# Altium PCB FM349readerV01.PcbDoc
Units mil, origin at the board's own origin, x right, y up, seen from the top; angles counter-clockwise.
Board outline 4950 x 3155 mil, 2 copper layers (Top Layer, Bottom Layer); 94 components, 76 nets, 417 pads, 114 vias.
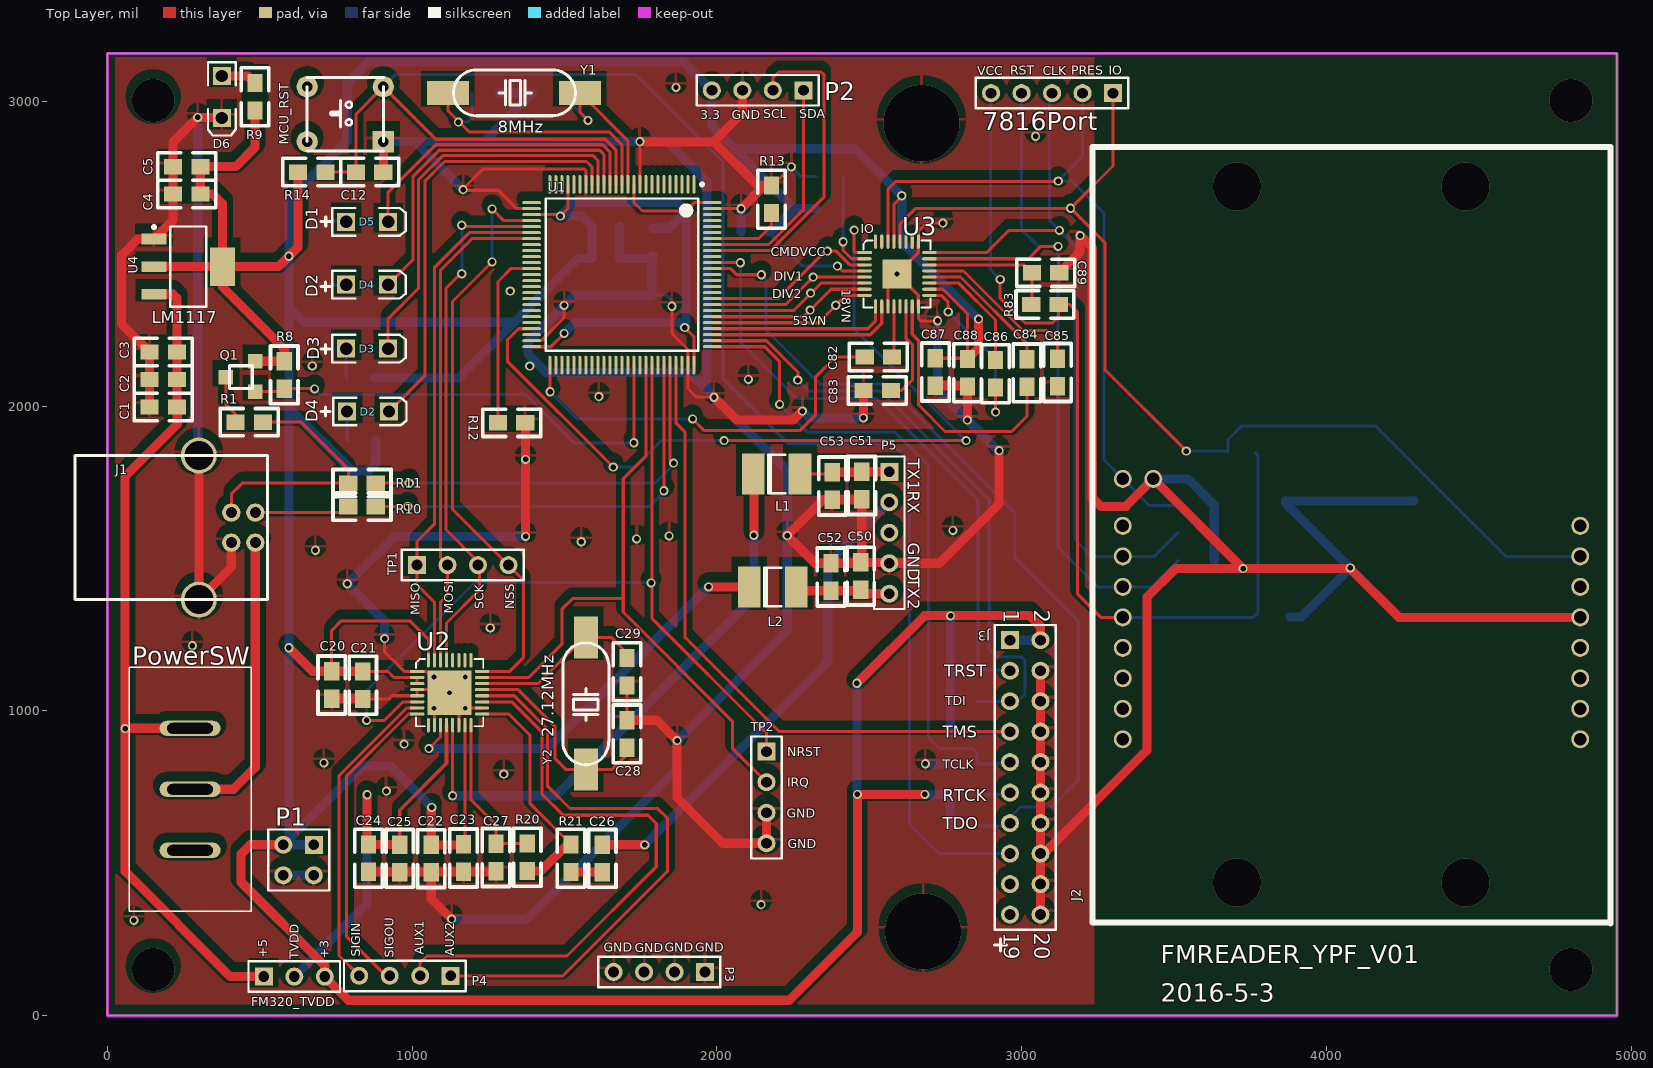
[diagram p0: Top Layer view]
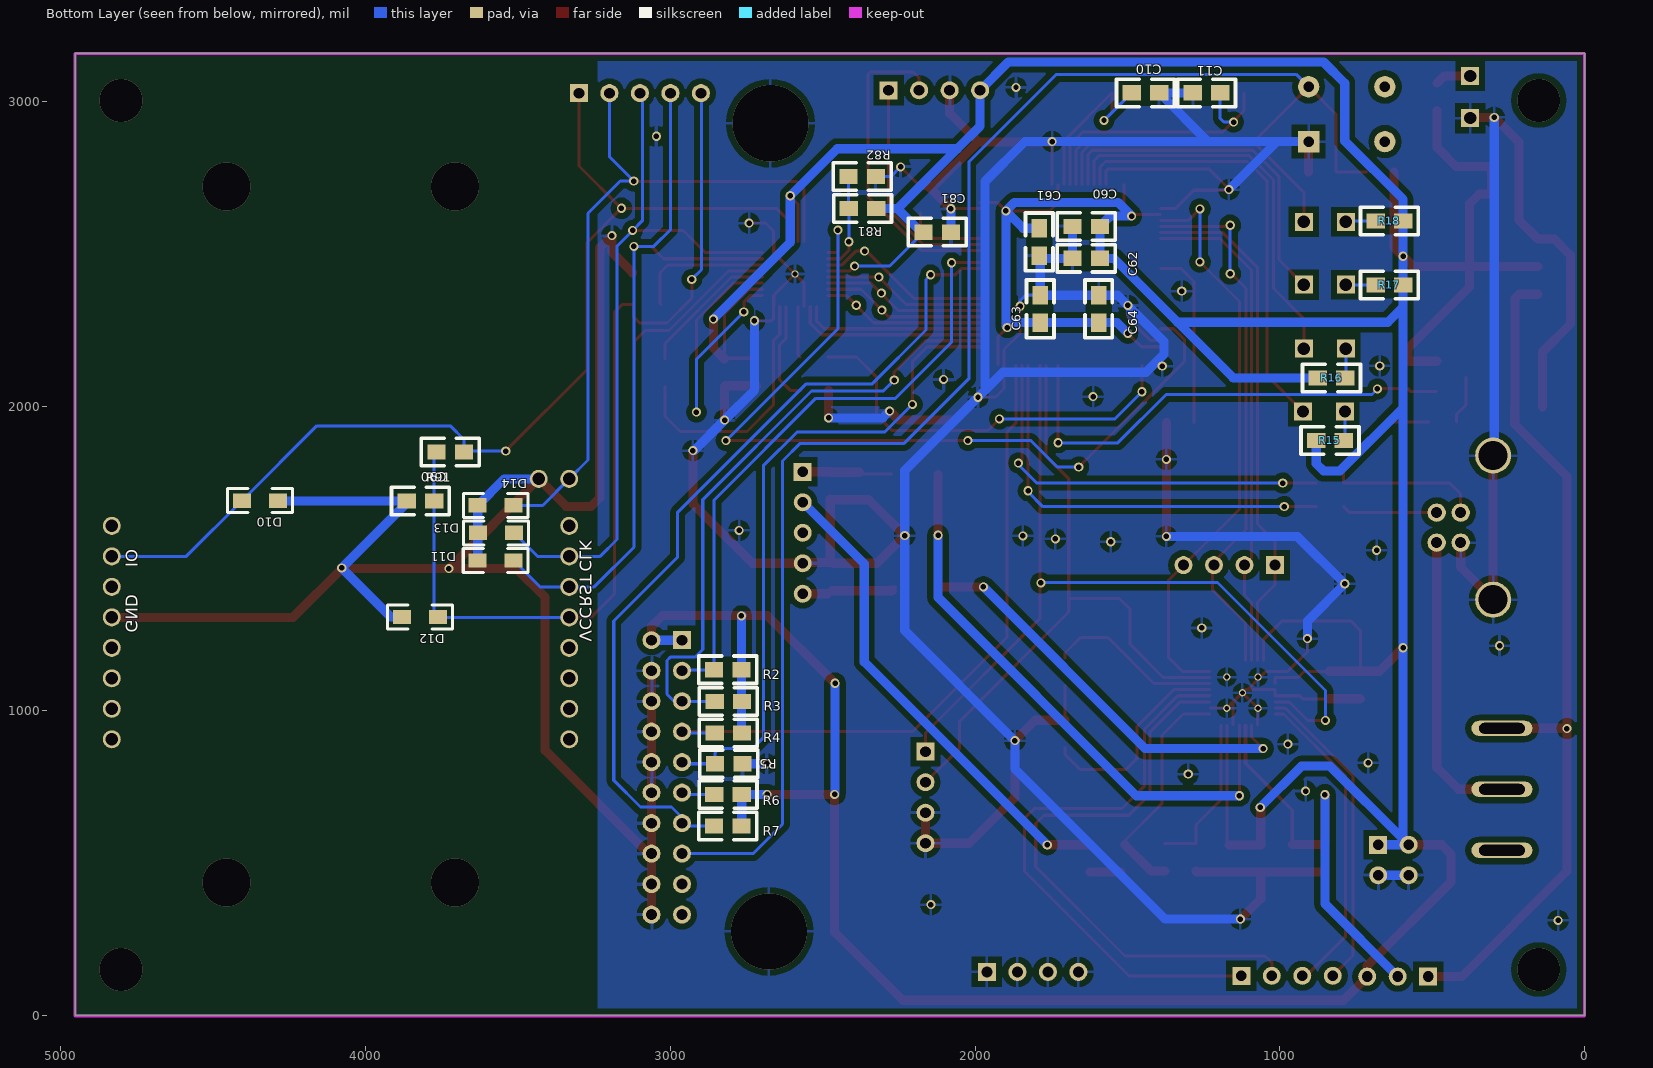
[diagram p1: Bottom Layer view, seen from below]

## Layer stack, top to bottom
Top Layer: signal copper 1.4
Dielectric: dielectric 12.6, FR-4, Dk 4.8
Bottom Layer: signal copper 1.4

## Board outline
0.98,3156.97 0.98,1.97 4950.98,1.97 4950.98,3156.97 0.98,3156.97

## Design rules (kind name [scope] priority, off if disabled: settings)
Clearance [(IsRegion)] p1: gap=19.68
Clearance Clearance_1 [All] p2: gap=8
ComponentClearance [All] p1 off: gap=10 collisioncheckmode=3 verticalgap=10 showdistances=FALSE
FabricationTestPointUsage TestPointUsage [All] p1: valid=0 allowmultiple=FALSE
FabricationTestpoint Testpoint [All] p1 off: side=3 testpointundercomponent=TRUE minsize=40 maxsize=100 preferedsize=60 minholesize=0 maxholesize=40 preferedholesize=32 testpointgrid=1 allowsidetop=TRUE allowsidebottom=TRUE usegrid=TRUE gridtolerance=0.01
HoleSize [All] p1 off: absolutevalues=TRUE maxlimit=196.85 minlimit=1 maxpercent=80.000 minpercent=20.000
MinimumSolderMaskSliver [All] p1: minsoldermaskwidth=3
PlaneConnect [All] p1: planeconnectstyle=Relief reliefexpansion=20 reliefentries=4 reliefconductorwidth=20 reliefairgap=10
PolygonConnect [All] p1: connectstyle=Relief reliefconductorwidth=10 reliefentries=4 polygonreliefangle="90 Angle"
RoutingVias [All] p1: holewidth=12 width=25 viastyle="Through Hole" minholewidth=10 minwidth=20 maxholewidth=19.68 maxwidth=31.5
SilkToSilkClearance [All] p1 off: silktosilkclearance=10
SilkscreenOverComponentPads [All] p1 off: minsilkscreentomaskgap=10
SolderMaskExpansion [All] p1: expansion=2
Width [All] p1: maxlimit=40 minlimit=10 preferedwidth=20
Width Width_1 [All] p2: maxlimit=10 minlimit=10 preferedwidth=10
20 further rules are at their usual default settings.

## Components (designator, comment, footprint, x,y, rotation, side; value= is the part's Value field where it differs from the comment)
7816Port "Header 5" HDR1X5 3299,3026 r180 top (schematic designator TP3)
C1 "10uF" 0805 138.98,1997.02 r0 top locked
C2 "10uF" 0805 228.98,2087.02 r180 top locked
C3 "0.1uF" 0805 138.98,2177.02 r0 top locked
C4 "10uF" 0805 305.98,2695.02 r180 top locked
C5 "0.1uF" 0805 215.98,2785.02 r0 top locked
C10 "20pF" 0805 1395.98,3026.97 r0 bottom
C11 "20pF" 0805 1285.98,3026.97 r180 bottom
C12 "1uF" 0805 905.98,2766.97 r180 top locked
C20 "10uF" 0805 736.5,1040 r90 top
C21 "0.1uF" 0805 838.7,1129.2 r270 top
C22 "10uF" 0805 1062.8,560.8 r270 top
C23 "0.1uF" 0805 1169.1,562.6 r270 top
C24 "0.1uF" 0805 857.6,562.2 r270 top
C25 "10uF" 0805 959.5,561.4 r270 top
C26 "0.1uF" 0805 1623.8,561.3 r270 top
C27 "0.1uF" 0805 1275.5,564.2 r270 top
C28 "15pF" 0805 1704.6,969.6 r270 top
C29 "15pF" 0805 1704.9,1083.7 r90 top
C50 "68pF" 0805 2471.3,1397.3 r90 top
C51 "68pF" 0805 2474.7,1694.2 r90 top
C52 "68pF" 0805 2373.7,1394.2 r90 top
C53 "68pF" 0805 2378.4,1692.8 r90 top
C60 "0.1uF" 0805 1680.5,2589.1 r180 bottom
C61 "0.1uF" 0805 1789.5,2493.1 r90 bottom
C62 "0.1uF" 0805 1680.5,2484.3 r180 bottom
C63 "0.1uF" 0805 1786.1,2363.4 r270 bottom
C64 "0.1uF" 0805 1594.5,2363.4 r270 bottom
C81 "0.1uF" 0805 2168.8,2570.2 r180 bottom
C82 "0.1uF" 0805 2484.3,2160.7 r0 top
C83 "0.1uF" 0805 2570.6,2051.2 r180 top
C84 "0.1uF" 0805 3016.4,2153.6 r270 top
C85 "0.1uF" 0805 3117,2065 r90 top
C86 "0.1uF" 0805 2913.7,2150.6 r270 top
C87 "0.1uF" 0805 2716.3,2066.6 r90 top
C88 "0.1uF" 0805 2821.6,2064.3 r90 top
C89 "0.1uF" 0805 3122.9,2436.8 r180 top
C90 "0.1uF" 0805 3774,1688.8 r0 bottom
D2 "LED2" 3.2X1.6X1.1 855.98,1981.97 r0 top locked
D3 "LED2" 3.2X1.6X1.1 852.98,2187.97 r0 top locked
D4 "LED2" 3.2X1.6X1.1 852.98,2397.97 r0 top locked
D5 "LED2" 3.2X1.6X1.1 852.98,2603.97 r0 top locked
D6 "LED2" 3.2X1.6X1.1 376,3013.1 r270 top
D10 "ESD" SOD-323 4344.56,1689.9 r0 bottom
D11 "ESD" SOD-323 3572.16,1493.2 r180 bottom
D12 "ESD" SOD-323 3820.14,1307.9 r180 bottom
D13 "ESD" SOD-323 3571.26,1584.2 r180 bottom
D14 "ESD" SOD-323 3571.96,1673.9 r180 bottom
FM320_TVDD "TVDD_SEL" HDR1X3 513.8,128.8 r0 top (schematic designator JP1)
J1 "USB" USB-B 485.98,1551.97 r0 top locked
J2 "Card Slot" BIG-CARD-SLOT 3330.98,906.97 r90 top
J3 "JTAG" HDR2X10 2960.98,1231.97 r270 top locked
L1 "1uH" 1812 2195.98,1776.97 r0 top locked
L2 "1uH" 1812 2182.98,1405.97 r0 top locked
MCU_RST "BUTTON" BUTTON-S 655.98,2866.97 r90 top locked (schematic designator RST)
P1 "Header 2X2" HDR2X2 677.9,561 r180 top
P2 "IIC_Port" HDR1X4 2283.46,3035.43 r180 top
P3 "CON4" HDR1X4 1961,144 r180 top
P4 "FM320_OUT" HDR1X4 1126.8,131.3 r180 top
P5 "Antenna" HDR1X5 2565.1,1784.3 r270 top locked
PowerSW "SW-SPST" SW 71.98,1143 r0 top (schematic designator S2)
Q1 "SI2301" SOT-23-2301 475.98,2056.97 r90 top locked
R1 "1.5K" 0805 510.98,1946.97 r180 top locked
R2 "10K" 0805 2765.98,1134.97 r0 bottom locked
R3 "10K" 0805 2763.98,1030.97 r0 bottom locked (schematic designator R2)
R4 "10K" 0805 2763.98,927.97 r0 bottom locked (schematic designator R3)
R5 "10K" 0805 2852.6,826.8 r180 bottom locked (schematic designator R3)
R6 "10K" 0805 2764.98,725.97 r0 bottom locked (schematic designator R4)
R7 "10K" 0805 2765.98,622.97 r0 bottom locked (schematic designator R5)
R8 "10K" 0805 580.98,2146.97 r270 top locked
R9 "1.5K" 0805 485,3059 r270 top
R10 "33" 0805 790.98,1669.97 r0 top locked
R11 "33" 0805 790.98,1746.97 r0 top locked
R12 "100K" 0805 1371.7,1944.9 r180 top
R13 "100K" 0805 2178.5,2723.1 r270 top
R14 "10K" 0805 625.98,2766.97 r0 top locked
R15 "330" 0805 790.98,1886.97 r0 bottom locked
R16 "330" 0805 875.98,2091.97 r180 bottom locked
R17 "330" 0805 685.98,2396.97 r180 bottom
R18 "330" 0805 685.98,2606.97 r180 bottom
R20 "820" 0805 1377.8,475.2 r90 top
R21 "1K" 0805 1521.3,471.7 r90 top
R81 "1.5K" 0805 2413.8,2647.5 r180 bottom
R82 "1.5K" 0805 2325,2752.3 r0 bottom
R83 "10K" 0805 3030.6,2332.9 r0 top
R91 "1.5K" 0805 3676,1849 r0 bottom
TP1 "CON4" HDR1X4 1016.4,1478.2 r0 top
TP2 "CON4" HDR1X4 2162.5,866.2 r270 top
U1 "STM32F103VBT6" LQFP100_L 1688.2,2430.6 r270 top locked
U2 "FM320" FM320_PIN32 1123.08,1059.83 r270 top
U3 "TDA8035" TDA8035_PIN32 2590.18,2432.93 r270 top locked
U4 "LM1117MP-3.3" MP04A_L 265.98,2456.97 r0 top locked
Y1 "8M" XTAL-0.2 1235.98,3026.97 r0 top
Y2 "27.12M" XTAL-0.2 1569.9,1123.29 r270 top

## Footprints (in the part's own frame and the unit in brackets; to place one, negate y for a bottom-side part, rotate by r counter-clockwise, add the part's x,y. Pads: shape width x height; smd on the part's side, far side on the other; paste and mask are expansions set on the pad)
3.2X1.6X1.1 [mm] "SMT LED; 2 Flat Leads"
  rect 1.5x1.5 hole 1.016: 1(-1.75,0) 2(1.75,0)
  silkscreen extent -2.9,-1.15 3.2,1.15
0805 [mil]
  rect 60x50 smd: 1(0,0) 2(90,0)
  silkscreen extent -50,-45 140,45
1812 [mm] "Chip Capacitor; Body 4.5 x 3.2 mm (LxW typ)"
  rect 1.9x3.4 smd: 1(-1.95,0) 2(1.95,0)
  silkscreen extent -0.7,-1.6 0.7,1.6
BIG-CARD-SLOT [mm]
  round 1.5 hole 1.05: 0(0,0) 0(0,-38.1) 0(2.54,0) 0(2.54,-38.1) 0(5.08,0) 0(5.08,-38.1) 0(7.62,0) 0(7.62,-38.1) 1(10.16,0) 2(12.7,0) 3(15.24,0) 4(17.78,0) 5(10.16,-38.1) 6(12.7,-38.1) 7(15.24,-38.1) 8(17.78,-38.1) 9(21.692,0) 10(21.692,-2.54)
  silkscreen extent -15.34,-40.64 49.33,2.54
BUTTON-S [mil]
  rect 70x70 hole 35: 1(0,-250)
  round 70 hole 35: 2(180,-250) 3(0,0) 4(180,0)
  silkscreen extent -30,-250 210,0
FM320_PIN32 [mm]
  rect 0.254x1.2 smd: 1(-1.777,-2.694)
  oval 0.254x1.2 smd: 2(-1.269,-2.694) 3(-0.761,-2.694) 4(-0.253,-2.694) 5(0.255,-2.694) 6(0.763,-2.694) 7(1.271,-2.694) 8(1.779,-2.694) 17(1.779,2.706) 18(1.271,2.706) 19(0.763,2.706) 20(0.255,2.706) 21(-0.253,2.706) 22(-0.761,2.706) 23(-1.269,2.706) 24(-1.777,2.706)
  oval 1.2x0.254 smd: 9(2.701,-1.772) 10(2.701,-1.264) 11(2.701,-0.756) 12(2.701,-0.248) 13(2.701,0.26) 14(2.701,0.768) 15(2.701,1.276) 16(2.701,1.784) 25(-2.699,1.784) 26(-2.699,1.276) 27(-2.699,0.768) 28(-2.699,0.26) 29(-2.699,-0.248) 30(-2.699,-0.756) 31(-2.699,-1.264) 32(-2.699,-1.772)
  round 0.6 hole 0.4: 33(-1.299,1.306) 33(-1.299,-1.294) 33(0.001,0.006) 33(1.301,1.306) 33(1.301,-1.294)
  rect 3.683x3.683 smd: 33(0.001,0.006)
  silkscreen extent -2.8,-2.79 2.8,2.81
HDR1X3 [mm] "Connector; Header; 3 Position"
  rect 1.5x1.5 hole 0.9: 1(0,0)
  round 1.5 hole 0.9: 2(2.54,0) 3(5.08,0)
  silkscreen extent -1.27,-1.27 6.35,1.27
HDR1X4 [mm] "Connector; Header; 4 Position"
  rect 1.5x1.5 hole 0.9: 1(0,0)
  round 1.5 hole 0.9: 2(2.54,0) 3(5.08,0) 4(7.62,0)
  silkscreen extent -1.27,-1.27 8.89,1.27
HDR1X5 [mm] "Connector; Header; 5 Position"
  rect 1.5x1.5 hole 0.9: 1(0,0)
  round 1.5 hole 0.9: 2(2.54,0) 3(5.08,0) 4(7.62,0) 5(10.16,0)
  silkscreen extent -1.27,-1.27 11.43,1.27
HDR2X2 [mm] "Connector; Header; 2x2 Position"
  rect 1.5x1.5 hole 0.9: 1(0,0)
  round 1.5 hole 0.9: 2(0,2.54) 3(2.54,0) 4(2.54,2.54)
  silkscreen extent -1.27,-1.27 3.81,3.81
HDR2X10 [mm] "Connector; Header; 10x2 Position"
  rect 1.5x1.5 hole 0.9: 1(0,0)
  round 1.5 hole 0.9: 2(0,2.54) 3(2.54,0) 4(2.54,2.54) 5(5.08,0) 6(5.08,2.54) 7(7.62,0) 8(7.62,2.54) 9(10.16,0) 10(10.16,2.54) 11(12.7,0) 12(12.7,2.54) 13(15.24,0) 14(15.24,2.54) 15(17.78,0) 16(17.78,2.54) 17(20.32,0) 18(20.32,2.54) 19(22.86,0) 20(22.86,2.54)
  silkscreen extent -1.27,-1.27 24.13,3.81
LQFP100_L [mm] "Thin QFP, 100-Leads, Body 14x14mm, Pitch 0.5mm, IPC High Density"
  oval 1.55x0.25 smd: 1(-7.525,6) 2(-7.525,5.5) 3(-7.525,5) 4(-7.525,4.5) 5(-7.525,4) 6(-7.525,3.5) 7(-7.525,3) 8(-7.525,2.5) 9(-7.525,2) 10(-7.525,1.5) 11(-7.525,1) 12(-7.525,0.5) 13(-7.525,0) 14(-7.525,-0.5) 15(-7.525,-1) 16(-7.525,-1.5) 17(-7.525,-2) 18(-7.525,-2.5) 19(-7.525,-3) 20(-7.525,-3.5) 21(-7.525,-4) 22(-7.525,-4.5) 23(-7.525,-5) 24(-7.525,-5.5) 25(-7.525,-6) 51(7.525,-6) 52(7.525,-5.5) 53(7.525,-5) 54(7.525,-4.5) 55(7.525,-4) 56(7.525,-3.5) 57(7.525,-3) 58(7.525,-2.5) 59(7.525,-2) 60(7.525,-1.5) 61(7.525,-1) 62(7.525,-0.5) 63(7.525,0) 64(7.525,0.5) 65(7.525,1) 66(7.525,1.5) 67(7.525,2) 68(7.525,2.5) 69(7.525,3) 70(7.525,3.5) 71(7.525,4) 72(7.525,4.5) 73(7.525,5) 74(7.525,5.5) 75(7.525,6)
  oval 0.25x1.55 smd: 26(-6,-7.525) 27(-5.5,-7.525) 28(-5,-7.525) 29(-4.5,-7.525) 30(-4,-7.525) 31(-3.5,-7.525) 32(-3,-7.525) 33(-2.5,-7.525) 34(-2,-7.525) 35(-1.5,-7.525) 36(-1,-7.525) 37(-0.5,-7.525) 38(0,-7.525) 39(0.5,-7.525) 40(1,-7.525) 41(1.5,-7.525) 42(2,-7.525) 43(2.5,-7.525) 44(3,-7.525) 45(3.5,-7.525) 46(4,-7.525) 47(4.5,-7.525) 48(5,-7.525) 49(5.5,-7.525) 50(6,-7.525) 76(6,7.525) 77(5.5,7.525) 78(5,7.525) 79(4.5,7.525) 80(4,7.525) 81(3.5,7.525) 82(3,7.525) 83(2.5,7.525) 84(2,7.525) 85(1.5,7.525) 86(1,7.525) 87(0.5,7.525) 88(0,7.525) 89(-0.5,7.525) 90(-1,7.525) 91(-1.5,7.525) 92(-2,7.525) 93(-2.5,7.525) 94(-3,7.525) 95(-3.5,7.525) 96(-4,7.525) 97(-4.5,7.525) 98(-5,7.525) 99(-5.5,7.525) 100(-6,7.525)
  silkscreen extent -7.65,-6.35 6.35,6.8, body extent -7,-7 7,7, height 1.6
MP04A_L [mm] "SOT223, 4-Leads, Body 6.5x3.5mm, Pitch 2.3mm, Lead Span 7mm, IPC High Density"
  rect 2.1x0.9 smd: 1(-2.85,2.3) 2(-2.85,0) 3(-2.85,-2.3)
  rect 2.1x3.2 smd: 4(2.85,0)
  silkscreen extent -2.97,-3.35 1.5,3.42, body extent -1.85,-3.35 1.85,3.35, height 1.8
SOD-323 [mm]
  rect 1.5x1.2 smd: 1(-1.5,0) 2(1.5,0)
  silkscreen extent -2.7,-1 2.7,1
SOT-23-2301 [mm]
  rect 1.2x1.2 smd: 1(-0.254,-0.254) 2(2.286,-0.254) 3(0.95,2.2)
  silkscreen extent 0,0 1.91,1.91
SW [mil]
  oval 200x50 hole 35 slot 150 at 0 deg: 1(200,-400) 2(200,-200) 3(200,-600)
  silkscreen extent 0,-800 400,0
TDA8035_PIN32 [mm]
  rect 0.254x1.2 smd: 1(-1.777,-2.694)
  oval 0.254x1.2 smd: 2(-1.269,-2.694) 3(-0.761,-2.694) 4(-0.253,-2.694) 5(0.255,-2.694) 6(0.763,-2.694) 7(1.271,-2.694) 8(1.779,-2.694) 17(1.779,2.706) 18(1.271,2.706) 19(0.763,2.706) 20(0.255,2.706) 21(-0.253,2.706) 22(-0.761,2.706) 23(-1.269,2.706) 24(-1.777,2.706)
  oval 1.2x0.254 smd: 9(2.701,-1.772) 10(2.701,-1.264) 11(2.701,-0.756) 12(2.701,-0.248) 13(2.701,0.26) 14(2.701,0.768) 15(2.701,1.276) 16(2.701,1.784) 25(-2.699,1.784) 26(-2.699,1.276) 27(-2.699,0.768) 28(-2.699,0.26) 29(-2.699,-0.248) 30(-2.699,-0.756) 31(-2.699,-1.264) 32(-2.699,-1.772)
  rect 2.4x2.4 smd: 33(0.001,0.006)
  round 0.6 hole 0.4: 33(0.001,0.006)
  silkscreen extent -2.8,-2.79 2.8,2.81
USB-B [mm]
  round 1.524 hole 0.92: 1(0,0) 2(0,2.5) 3(-2,2.5) 4(-2,0)
  round 3 hole 2.4: 5(-4.7,7.25) 6(-4.7,-4.75)
  silkscreen extent -15,-4.75 1,7.25
XTAL-0.2 [mm]
  rect 3.5x2 smd: 1(-3,0) 2(8,0)
  silkscreen extent -2.54,-1.91 7.62,1.91

## Part data
7816Port: "Header, 5-Pin"
C1 C3 C5 C10 C11 C12 C20 C21 C22 C23 C24 C26 C27 C28 C29 C50 C51 C52 C53 C60 C61 C62 C63 C64 C81 C82 C83 C84 C85 C86 C87 C88 C89 C90: library part Cap, "Capacitor"
C2 C4: library part "Cap Pol1", "Polarized Capacitor (Radial)"
C25: library part CAP, "Capacitor"
D2 D3 D4 D5 D6: "Typical RED, GREEN, YELLOW, AMBER GaAs LED"
D10 D11 D12 D13 D14: library part "D Zener", "Zener Diode"
FM320_TVDD: library part "Header 3", "Header, 3-Pin"
J3: library part "Header 10X2", "Header, 10-Pin, Dual row"
L1 L2: library part Inductor, "Inductor"
MCU_RST: "ƹ?"
P1: "Header, 2-Pin, Dual row"
P2 P4: library part "Header 4", "Header, 4-Pin"
P3 TP1 TP2: "Connector"
P5: library part "Header 5", "Header, 5-Pin"
PowerSW: "Single-Pole, Single-Throw Switch"
Q1: library part PMOS-2, "P-Channel Power MOSFET"
R1 R2 R3 R4 R5 R6 R7 R8 R9 R10 R11 R12 R13 R14 R15 R16 R17 R18 R20 R21 R81 R82 R83 R91: library part Res2, "Resistor"
U1: "STM32 ARM-based 32-bit MCU with 64 Kbytes Flash, 100-pin LQFP, Industrial Temperature"
U2: library part PN5120A0HN1
U4: "800mA Low-Dropout Linear Regulator"
Y1 Y2: library part XTAL, "Crystal Oscillator"

## Via types
v1: diameter 30, hole 18, Top Layer to Bottom Layer, 104 vias
v2: diameter 140, hole 140, Top Layer to Bottom Layer, 4 vias
v3: diameter 157.48, hole 157.48, Top Layer to Bottom Layer, 4 vias
v4: diameter 250, hole 250, Top Layer to Bottom Layer, 2 vias

## Nets (pads, with @x,y where several pads share a name; then routed paths per layer and width w, separated by ;. In a path a pad name is that pad's centre, name@x,y a point inside that pad or via, vN(x,y) a via of type N, cw(c..) or ccw(c..) an arc to the next point about the centre after c; other vN are vias at no path point)
+3.3: C4.1 C5.2 C20.2 C21.1 C22.1 C23.1 C60.2 C61.2 C62.2 C63.2 C64.2 C81.1 C87.2 C88.2 FM320_TVDD.3 J3.1 J3.2 P1.1 P1.3 P2.4 Q1.2 R2.1 R3.1 R4.1 R6.1 R7.1 R8.1 R9.2 R14.1 R15.2 R16.1 R17.2 R18.2 R81.2 U1.11 U1.22 U1.28 U1.50 U1.75 U1.100 U2.2 U2.3 U2.15 U2.32 U3.4 U3.18 U3.29 U4.2 U4.4 | length 20581.8
  Top Layer w10: C20.2 736.5,1263.6 768.2,1295.3 992.6,1295.3 1053.3,1234.6 U2.32 ; C21.1 921.1,1129.2 940.5,1109.8 U2.2 U2.3 ; C23.1@1167.3,560.8 C23.1 1173.3,566.8 U2.15 ; U1.50 1455.18,2194.38 v1(1498.8,2238) ; U1.28 1482.25,2627.45 v1(1486.6,2623.1) 1511.03,2647.53 U1.22 ; U1.11 1727.57,2667.73 1755.7,2639.6 v1(1898.7,2639.6) 1925.92,2666.82 U1.100 ; v1(1894.4,2257.1) 1924.42,2227.08 U1.75 ; v1(2395,2459) 2411.1,2442.9 U3.4 ; U3.29 2580.4,2661.8 v1@2607.4,2688.8 ; U3.18 2741.26,2382.9 2821.6,2302.56 C88.2 2819.3,2156.6 C87.2
  Top Layer w30: U4.2 U4.4 ; R9.2 485,2848 422.02,2785.02 C5.2 C4.1 347.08,2695.02 378.19,2663.91 U4.4 ; Q1.2 R8.1 580.98,2188.02 378.19,2390.81 U4.4 ; P1.3 469.4,561 439,530.6 439,439 713.8,164.2 FM320_TVDD.3 ; v1(596.5,1207.2) 673.7,1130 C20.2 837.9,1130 C21.1 ; R14.1 625.98,2520.88 v1(596.4,2491.3) 562.07,2456.97 U4.4 ; FM320_TVDD.3@718.7,133.7 FM320_TVDD.3 ; v1(1064.5,683.8) 1062.8,682.1 C22.1 C23.1@1167.3,560.8 ; v1(2459.25,1090.65) 2681,1312.4 3025.4,1312.4 3060.98,1276.82 J3.2 ; v1(2681.8,726.2) v1(2460.4,726.2) 2460.4,274.4 2237,51 791.6,51 FM320_TVDD.3 ; C88.2 2858,2190.7 v1(2858,2285)
  Bottom Layer w10: C81.1 2280,2459 v1(2395,2459)
  Bottom Layer w30: P1.1 P1.3 P1.3@595.98,579.08 ; R16.1 876.42,2092.4 1153.4,2092.4 1335.6,2274.6 ; R15.2 880.98,1810.98 856.8,1786.8 803.63,1786.8 595.98,1994.44 ; v1(1064.5,683.8) 929.4,818.9 835.8,818.9 P1.3@595.98,579.08 ; v1(1498.8,2238) 1534.2,2273.4 C64.2 C63.2 1878.1,2273.4 v1(1894.4,2257.1) 1898.7,2261.4 v1(1898.7,2639.6) ; C61.2 1842.2,2583.1 v1(1898.7,2639.6) ; C81.1 2176.9,2570.2 2254.2,2647.5 ; R81.2 2254.2,2647.5 ; v1(2459.25,1090.65) 2459.25,727.35 v1(2460.4,726.2) ; v1(2681.8,726.2) 2682.03,725.97 R6.1 2764.98,623.97 R7.1 ; R4.1 2765.98,929.97 R2.1 v1(2765.98,1311.72) v1@2765.3,1312.4 ; v1(2858,2285) 2606.1,2536.9 v1(2606.1,2689.5) 2452,2843.6 2058.1,2843.6 ; J3.1 J3.2 ; P1.3@595.98,579.08 595.98,1994.44 ; 595.98,1994.44 595.98,2325.02 ; 595.98,2325.02 R17.2 R18.2 595.98,2677.58 787.5,2869.1 787.5,3058.6 857.24,3128.34 1890.56,3128.34 P2.4 1983.46,2918.24 2058.1,2843.6 ; 595.98,2325.02 646.4,2274.6 1335.6,2274.6 ; 1335.6,2274.6 1545.3,2484.3 C62.2 C60.2 1556.5,2623.1 v1(1486.6,2623.1) 1531.3,2667.8 1870.5,2667.8 v1(1898.7,2639.6) ; 2058.1,2843.6 2254.2,2647.5
+5: C1.2 C2.1 C3.2 FM320_TVDD.1 PowerSW.2 U4.3 | length 2842.4
  Top Layer w30: U4.3 215.88,2366.42 228.98,2353.32 C3.2 C2.1 C1.2 230.1,1995.91 230.1,1940.3 59.1,1769.3 v1(59.1,942) ; PowerSW.2 60.1,943 v1(59.1,942) ; FM320_TVDD.1 404,128.8 59.1,473.7 v1(59.1,942)
CARDCLK: 7816Port.3 D13.2 J2.3 U3.24 | length 2350.7
  Top Layer w10: U3.24 2884.3,2502.9 2957.1,2575.7 v1(3123,2575.7)
  Bottom Layer w10: 7816Port.3 3091.3,3018.3 3091.3,2607.4 v1(3123,2575.7) 3174.4,2524.3 3174.4,1561.9 3229.33,1506.97 J2.3 3434.97,1506.97 D13.2
CARDIO: 7816Port.1 D10.2 J2.7 R91.1 U3.28 | length 3559.5
  Top Layer w10: U3.28 2600.4,2596.8 2652,2648.4 v1(3160,2648.4) ; 7816Port.1 3299,2787.4 v1(3160,2648.4) ; v1@3537,1849 3537,1855 3272,2120 3272,2536.4 v1(3160,2648.4)
  Bottom Layer w10: v1(3539,1852) 3673,1852 R91.1 3676,1890 3721,1935 4158.51,1935 D10.2 4586.54,1506.97 J2.7
CARDPRES: 7816Port.2 D14.2 J2.9 U3.30 | length 2370.7
  Top Layer w10: U3.30 2560.4,2710.2 2586.3,2736.1 3117.6,2736.1 v1(3119.3,2737.8)
  Bottom Layer w10: 7816Port.2 3199,2817.5 v1(3119.3,2737.8) 3163.2,2737.8 3269,2632 3269,1822.97 J2.9 3418.07,1673.9 D14.2
CARDRST: 7816Port.4 D11.2 J2.2 U3.23 | length 2499.5
  Top Layer w10: U3.23 3021.4,2482.9 3062,2523.5 v1(3118.7,2523.5)
  Bottom Layer w10: 7816Port.4 2999,2578 3053.5,2523.5 v1(3118.7,2523.5) 3118.7,1537.2 3248.93,1406.97 J2.2 3426.87,1406.97 D11.2
CARDVCC: 7816Port.5 C90.1 D12.2 J2.1 R83.2 R91.2 | length 3112.9
  Top Layer w10: v1(2928.9,2415.3) 2928.9,2353.7 3010.5,2272.1 3099.8,2272.1 3120.6,2292.9 R83.2 3157.1,2332.9 3183,2307 3183,1383 3259.03,1306.97 J2.1
  Bottom Layer w10: 7816Port.5 2897,3024 2897,2447.2 v1(2928.9,2415.3) ; J2.1 3760.16,1306.97 D12.2 3774,1320.81 C90.1 3774,1838 R91.2@3767,1845
FM320_AUX1: P4.2 U2.19 | length 1945
  Top Layer w10: P4.2 1026.8,173.8 1049.1,196.1 1508,196.1 1800.9,489 1800.9,631.1 1774.1,657.9 1495.7,657.9 1425.8,727.8 1425.8,931.4 1327.4,1029.8 U2.19
FM320_AUX2: P4.1 U2.20 | length 1911.4
  Top Layer w10: P4.1 1495,131.3 1837.8,474.1 1837.8,647.8 1804.6,681 1803.7,680.1 1518.2,680.1 1443.8,754.5 1443.8,941 1335,1049.8 U2.20
FM320_IRQ: TP2.2 U1.67 U2.23 | length 2231
  Top Layer w10: U2.23 1382.9,1109.8 1491.4,1218.3 1491.4,1333.4 1526,1368 1692.65,1368 ; U1.67 1766.94,1835.24 1692.65,1760.95 1692.65,1324.35 2050.6,966.4 2050.6,878.1 TP2.2
FM320_NRST: TP2.1 U1.68 U2.6 | length 2793.3
  Top Layer w10: v1(851,969) 909.7,969 970.5,1029.8 U2.6 ; U1.68 1786.3,2134.01 1786.3,1303.7 2162.5,927.5 TP2.1
  Bottom Layer w10: v1(851,969) 851,1067 1205,1421 1783,1421 v1(1784,1420)
FM320_SIGIN: P4.4 U2.7 | length 1032.3
  Top Layer w10: P4.4 760.3,197.8 760.3,787.1 983,1009.8 U2.7
FM320_SIGOUT: P4.3 U2.8 | length 1037.7
  Top Layer w10: P4.3 914.1,131.3 784.73,260.67 784.73,786.07 988.46,989.8 U2.8
FM320_SPI_MISO: TP1.1 U1.31 U2.31 | length 1700.8
  Top Layer w10: U2.31 1073.3,1357.29 1016.4,1414.19 TP1.1 1016.4,1555.7 1073.3,1612.6 1073.3,2453.6 1188.1,2568.4 U1.31
FM320_SPI_MOSI: TP1.2 U1.32 U2.30 | length 1639.9
  Top Layer w10: U2.30 1093.3,1357.3 1116.4,1380.4 TP1.2 1093.3,1501.3 1093.3,2445.5 1196.51,2548.71 U1.32
FM320_SPI_NSS: TP1.4 U1.29 U2.24 | length 1921.6
  Top Layer w10: U2.24 1320.4,1129.8 1365.1,1174.5 1365.1,1429.5 TP1.4 1132.8,1661.8 1132.8,2343 v1(1262.3,2472.5) ; v1(1262.3,2646.5) 1301.03,2607.77 U1.29
  Bottom Layer w10: v1(1262.3,2472.5) v1(1262.3,2646.5)
FM320_SPI_SCK: TP1.3 U1.30 U2.29 | length 1772
  Top Layer w10: U2.29 1113.3,1288.3 1221.95,1396.95 1221.95,1472.65 TP1.3 1216.4,1489.6 1111.3,1594.7 1111.3,2385.9 1159,2433.6 v1(1163.2,2433.6) ; v1(1163.2,2592.7) 1167.82,2588.08 U1.30
  Bottom Layer w10: v1(1163.2,2433.6) v1(1163.2,2592.7)
FM320_TVDD: C24.1 C25.1 FM320_TVDD.2 U2.12 | length 1418.4
  Top Layer w10: C24.1@852.5,567.3 C24.1 ; C25.1@958.7,562.2 C25.1
  Top Layer w12: C25.1 959.5,674.4 1113.3,828.2 U2.12
  Top Layer w30: C24.1@852.5,567.3 v1(852.5,725.2) ; C24.1 C25.1@958.7,562.2
  Bottom Layer w30: FM320_TVDD.2 852.5,367.5 v1(852.5,725.2)
GND: C1.1 C2.2 C3.1 C4.2 C5.1 C10.1 C11.1 C12.1 C20.1 C21.2 C22.2 C23.2 C24.2 C25.2 C27.2 C28.1 C29.1 C50.2 C51.1 C52.2 C53.1 C60.1 C61.1 C62.1 C63.1 C64.1 C81.2 C83.2 C85.1 C87.1 C88.1 C89.1 C90.2 D6.2 D10.1 D11.1 D12.1 D13.1 D14.1 J1.4 J1.5 J1.6 J2.5 J2.10 J3.4 J3.6 J3.8 J3.10 J3.12 J3.14 J3.16 J3.18 J3.20 MCU_RST.1 P1.2 P1.4 P2.3 P3.1 P3.2 P3.3 P3.4 P5.4 R5.2 R12.1 R13.1 R82.1 TP2.3 TP2.4 U1.10 U1.19 U1.27 U1.49 U1.74 U1.99 U2.1 U2.4 U2.5 U2.10 U2.14 U2.18 U2.33 U3.11 U3.16 U3.25 U3.33 U4.1 | length 26114.6
  Top Layer w10: C21.2 924.8,1039.2 935.4,1049.8 U2.5 U2.4 ; v1(909.9,1237.1) 909.9,1194.1 974.2,1129.8 U2.1 1045.52,1129.8 U2.33@1105.52,1069.8 ; U2.4 U2.33@1105.52,1069.8 ; U2.10 1073.3,1009.8 U2.33@1123.3,1059.8 ; U2.14 U2.33@1153.3,1029.8 ; U2.18 1173.3,1009.8 U2.33@1153.3,1029.8 ; U1.49 1392.28,2214.4 1423.53,2214.4 1498.7,2289.57 v1(1498.7,2329.7) ; U1.27 1343.36,2647.14 1282.9,2707.6 1167.63,2707.6 1165.2,2710.03 1231.5,2776.33 1231.5,2778 1563.8,2778 1570.09,2771.71 U1.19 ; C28.1 1704.9,969.9 C29.1 ; U1.10 v1@1747.26,2858.46 ; v1@1747.9,2859.1 v1@1755,2866.2 ; v1(1852.5,2327) 1852.5,2237.3 1904.74,2185.06 U1.74 1904.74,2057.26 1933.1,2028.9 v1(1990.3,2028.9) ; U1.99 v1(2079.34,2647.14) ; R13.1 2183.1,2723.1 v1(2244.3,2784.3) ; U3.11 2560.4,2402.9 U3.33@2590.4,2432.9 ; v1(2723.4,2279.5) 2668.4,2279.5 2660.4,2287.5 U3.16 2660.08,2326.92 2660.08,2363.22 U3.33@2590.4,2432.9 ; v1(2740.8,2600) 2687.5,2600 2660.4,2572.9 U3.25 2660.08,2538.88 2660.08,2502.58 U3.33@2590.4,2432.9 ; U2.33@1105.52,1069.8 1113.3,1069.8 U2.33@1123.3,1059.8 ; U2.33@1123.3,1059.8 U2.33@1153.3,1029.8
  Top Layer w30: C1.1 C2.2 C3.1 47.5,2268.51 47.5,2494.8 100.22,2547.52 U4.1 215.98,2609.72 C4.2 C5.1 215.98,2865.28 v1(297.35,2946.65) 373.55,2946.65 D6.2 ; J1.5 J1.6 407.24,1471.26 J1.4 ; C20.1 837.9,1040 C21.2 ; C24.2 1273.5,472.2 C27.2 ; C12.1 MCU_RST.1 ; C22.2 1062.8,384.1 v1(1129.8,317.1) ; R12.1 1371.7,1825.8 v1(1372.6,1824.9) v1(1372.6,1572.2) ; C28.1 1802.4,969.6 v1(1869.4,902.6) 1869.4,715.6 2018.8,566.2 TP2.4 TP2.3 ; v1@1755,2866.2 1990.1,2866.2 ; v1(1990.3,2028.9) 2065.2,1954 2250.4,1954 v1(2280,1983.6) ; v1(2079.34,2647.14) R13.1@2155.3,2723.1 ; P2.3 2083.46,2959.56 1990.1,2866.2 ; R13.1 R13.1@2155.3,2723.1 ; v1(2480.1,1960.9) 2480.1,2050.7 C83.2 ; C87.1 2819.3,2066.6 C88.1 v1(2821.6,1954) ; v1(2925.3,1853.9) 2925.3,1679.6 2730,1484.3 P5.4 2562.1,1487.3 C50.2 C50.2@2470.1,1488.5 ; J3.18 J3.20 ; J3.16@3060.98,521.98 3410,871 3410,1373 3503.7,1466.7 v1(3725.27,1466.7) ; J3.4 J3.6 J3.8 J3.10 J3.12 J3.14 J3.16 J3.20 ; J3.20@3065.75,327.2 J3.20 ; C89.1 3191,2504.9 v1(3191,2559) 3231,2519 3231,1699 3259,1671 3341,1671 J2.10 v1(3725.27,1466.7) ; v1(4077,1468.8) v1@4077,1466.7 ; J2.5 4830.82,1306.8 4236.9,1306.8 v1@4077,1466.7 ; 1990.1,2866.2 2133.2,2723.1 R13.1@2155.3,2723.1 ; C50.2@2470.1,1488.5 2474.7,1493.1 C51.1 2473.3,1692.8 C53.1 2348.3,1692.8 v1(2230.7,1575.2) 2321.7,1484.2 C52.2 2465.8,1484.2 C50.2@2470.1,1488.5 ; v1(3725.27,1466.7) v1@4077,1466.7
  Bottom Layer w10: C63.1 1834.4,2363.4 1852.5,2345.3 v1(1852.5,2327) ; v1(2244.3,2784.3) 2276.3,2752.3 R82.1
  Bottom Layer w30: J1.5@283.1,1855.25 J1.5 ; J1.5@297.35,1869.5 v1(297.35,2946.65) ; P1.4 P1.2 ; MCU_RST.1 1010.13,2866.97 ; v1(909.9,1237.1) 909.9,1294.7 v1(787.6,1417) 942.8,1572.2 v1(1372.6,1572.2) ; v1(1129.8,317.1) 1376.2,317.1 1869.4,810.3 v1(1869.4,902.6) 2230.7,1263.9 v1(2230.7,1575.2) 2230.7,1788.5 v1(1990.3,2028.9) 1967.3,2051.9 ; v1(1167.6,2709.5) 1010.13,2866.97 ; C11.1 C10.1 1235.98,2866.97 ; C60.1 C62.1 1780.7,2484.3 C61.1@1786.1,2489.7 ; C61.1 C61.1@1786.1,2489.7 ; C81.2 2078.8,2646.6 v1(2079.34,2647.14) ; v1(2280,1983.6) 2302.7,1960.9 v1(2480.1,1960.9) ; v1(2683.8,826.8) R5.2 ; v1(2723.4,2279.5) 2723.4,2052.2 v1(2821.6,1954) 2921.7,1853.9 v1(2925.3,1853.9) ; J2.10 3543.93,1760.98 D14.1 3631.01,1493.4 D11.1 ; D12.1 3916.1,1307.9 v1(4077,1468.8) 3864,1681.8 C90.2 4284.4,1688.8 D10.1 ; 1010.13,2866.97 1235.98,2866.97 ; 1235.98,2866.97 v1(1747.1,2866.97) 1836.53,2866.97 1967.3,2736.2 1967.3,2051.9 ; C61.1@1786.1,2489.7 C63.1 C64.1 1532.4,2363.4 v1(1498.7,2329.7) 1380.2,2211.2 1380.2,2170.1 1439.4,2110.9 1908.3,2110.9 1967.3,2051.9
  other v1: 88,313 2145,365 916,737 1301,793 711,829.6 974.2,891 280,1214 1256.53,1272 683,1527 1555,1555 1736.55,1564 1843,1574 2774,1592 1613,2031 2103.39,2087 673,2131.71 1386,2131 1322,2377.03 3045,2884.46 1865.7,3045
  other v4: 2675.98,276.97 2670.98,2926.97
IIC_SCL: P2.2 U1.92 | length 1060.9
  Top Layer w10: U1.92 2175,2509.34 2350.6,2684.94 2350.6,3087.9 2343,3095.5 2202.8,3095.5 2183.46,3076.16 P2.2
IIC_SDA: P2.1 U1.93 | length 738.5
  Top Layer w10: U1.93 2169.23,2529.03 2283.46,2643.26 P2.1
LED1: D2.2 U1.18 | length 1442.9
  Top Layer w10: D2.2 1042,2099.09 1042,2737.04 1106.76,2801.8 1572.4,2801.8 1589.77,2784.43 U1.18
LED2: D3.2 U1.17 | length 1300.7
  Top Layer w10: D3.2 921.88,2286.38 1020.8,2385.3 1020.8,2741.3 1100.33,2820.83 1593.87,2820.83 1609.46,2805.24 U1.17
LED3: D4.2 U1.16 | length 1154.1
  Top Layer w10: D4.2 1002.8,2478.89 1002.8,2752.2 1089.43,2838.83 1615.67,2838.83 1629.14,2825.36 U1.16
LED4: D5.2 U1.15 | length 1004.7
  Top Layer w10: D5.2 921.88,2700.98 1077.73,2856.83 1625.3,2856.83 1648.83,2833.3 U1.15
NetC10_2: C10.2 U1.12 Y1.2 | length 594.6
  Top Layer w10: v1(1577.1,2936.8) 1550.94,2962.96 Y1.2 1707.89,2870.03 U1.12
  Bottom Layer w10: C10.2 1576.15,2936.8 v1(1577.1,2936.8)
NetC11_2: C11.2 U1.13 Y1.1 | length 937.8
  Top Layer w10: Y1.1 1117.87,2968.03 1186.8,2899.1 1645.8,2899.1 1688.2,2856.7 U1.13
  Bottom Layer w10: v1(1152.2,2931.3) 1184.2,2931.3 1195.98,2943.08 C11.2
NetC26_2: C26.2 R21.1 | length 102.7
  Top Layer w10: C26.2@1623.4,471.7 C26.2
  Top Layer w30: R21.1 C26.2@1623.4,471.7
NetC28_2: C28.2 U2.21 Y2.2 | length 688.2
  Top Layer w10: U2.21 1347.9,1069.8 1469.4,948.3 1469.4,842.7 1503.77,808.33 Y2.2 1656.33,808.33 1704.6,856.6 C28.2
NetC29_2: C29.2 U2.22 Y2.1 | length 575.5
  Top Layer w10: U2.22 1413.6,1089.8 1565.2,1241.4 Y2.1 1653.2,1241.4 1704.9,1189.7 C29.2
NetC50_1: C50.1 C52.1 L2.2 P5.5 | length 356
  Top Layer w10: L2.2@2271.52,1394.2 L2.2 L2.2@2282.23,1405.97 ; C52.1@2361.93,1405.97 C52.1 ; C50.1@2468.2,1394.2 C50.1 C50.1@2484.3,1384.3
  Top Layer w30: L2.2@2271.52,1394.2 C52.1 C50.1@2468.2,1394.2 ; C50.1@2484.3,1384.3 P5.5
NetC51_2: C51.2 C53.2 L1.2 P5.1 | length 295.4
  Top Layer w10: L1.2 2372.57,1776.97 C53.2 ; C51.2@2473.3,1782.8 C51.2 ; P5.1@2565,1784.2 P5.1
  Top Layer w30: C53.2 C51.2@2473.3,1782.8 ; C51.2 P5.1@2565,1784.2
NetC82_2: C82.2 U3.12 | length 168.4
  Top Layer w10: C82.2 2580.4,2166.8 U3.12
NetC83_1: C83.1 U3.14 | length 334.3
  Top Layer w10: C83.1 2605.8,2051.2 2641.7,2087.1 2641.7,2199.36 2620.4,2220.66 U3.14
NetC84_1: C84.1 U3.20 | length 461.7
  Top Layer w10: U3.20 2799,2422.9 3016.4,2205.5 C84.1
NetC84_2: C84.2 U3.15 | length 841
  Top Layer w10: U3.15 2640.4,2235.1 2661.4,2214.1 2661.4,2003.3 2748.1,1916.6 2967.1,1916.6 3016.4,1965.9 C84.2
NetC85_2: C85.2 U3.21 | length 572.9
  Top Layer w10: U3.21 2808.4,2442.9 3003.5,2247.8 3081.2,2247.8 3117,2212 C85.2
NetC86_1: C86.1 U3.19 | length 398.6
  Top Layer w10: U3.19 2793,2402.9 2913.7,2282.2 C86.1
NetC86_2: C86.2 U3.17 | length 576.5
  Top Layer w10: U3.17 2735.8,2362.9 2758.3,2340.4 v1(2758.3,2308.4) ; C86.2 2914,2060.3 v1(2914,1980)
  Bottom Layer w10: v1(2758.3,2308.4) 2914,2152.7 v1(2914,1980)
NetC89_2: C89.2 R83.1 U3.22 | length 451.9
  Top Layer w10: U3.22 3006.8,2462.9 C89.2 3032.9,2335.2 R83.1
NetD2_1: D2.1 R15.1 | length 96.6
  Bottom Layer w10: D2.1 787.09,1890.87 R15.1
NetD3_1: D3.1 R16.2 | length 96.8
  Bottom Layer w10: D3.1 784.09,2093.87 R16.2
NetD4_1: D4.1 R17.1 | length 98.5
  Bottom Layer w10: R17.1 783.09,2396.97 D4.1
NetD5_1: D5.1 R18.1 | length 99.3
  Bottom Layer w10: R18.1 781.09,2606.97 D5.1
NetD6_1: D6.1 R9.1 | length 118.5
  Top Layer w30: D6.1 462,3082 R9.1
NetJ1_1: J1.1 PowerSW.1 | length 980.8
  Top Layer w30: PowerSW.1 414,743 485.98,814.98 J1.1
NetQ1_2: Q1.3 R1.2 | length 160.5
  Top Layer w10: Q1.3 389.37,2004.23 420.98,1972.62 R1.2
NetR10_2: R10.2 U1.70 | length 1381.1
  Top Layer w10: R10.2 v1(985.73,1669.97) ; v1(1826,1722) U1.70
  Bottom Layer w10: v1(985.73,1669.97) 1777.77,1669.97 1826,1718.2 v1(1826,1722)
NetR11_2: R11.2 U1.71 | length 1333.6
  Top Layer w10: R11.2 v1(990.83,1746.97) ; U1.71 1845.68,1825.32 v1(1858,1813)
  Bottom Layer w10: v1(990.83,1746.97) 1796.77,1746.97 1858,1808.2 v1(1858,1813)
NetR12_2: R12.2 U1.37 | length 591.1
  Top Layer w10: R12.2 1281.7,2408.4 1323.59,2450.29 U1.37
NetR13_2: R13.2 U1.94 | length 253.5
  Top Layer w10: U1.94 2136.01,2548.71 2178.5,2591.2 R13.2
NetR20_1: R20.1 R21.2 U2.17 | length 779.5
  Top Layer w10: U2.17 1317,989.8 1387.6,919.2 1387.6,695.4 R21.2 R21.2@1508.8,561.7
  Top Layer w30: R20.1 1422.3,475.2 R21.2@1508.8,561.7
NetR81_1: R81.1 R82.2 U3.2 | length 324.4
  Top Layer w10: v1(2413.4,2538.6) 2413.4,2510.86 2441.36,2482.9 U3.2
  Bottom Layer w10: v1(2413.4,2538.6) 2413.8,2539 R81.1 2415,2648.7 R82.2
RESET: C12.2 J3.15 MCU_RST.2 R14.2 U1.14 | length 5623
  Top Layer w10: R14.2 C12.2 815.98,2956.97 MCU_RST.2 1078.12,2874.83 1633.6,2874.83 1668.51,2839.91 U1.14
  Bottom Layer w10: MCU_RST.2 946.72,3087.7 1732.9,3087.7 2020.5,2800.1 2020.5,2089.4 2232.3,1877.6 2573.6,1877.6 2631.6,1819.6 2631.6,628.8 2728.43,531.97 J3.15
RTCK: J3.11 R6.2 | length 108.5
  Bottom Layer w10: R6.2 2954.98,725.97 J3.11
RX: C26.1 P5.2 | length 1595.3
  Top Layer w10: v1@1762.4,561.3 v1(1763,560.7)
  Top Layer w30: C26.1 v1@1762.4,561.3
  Bottom Layer w30: v1(1763,560.7) 2363.2,1160.9 2363.2,1482.4 P5.2
TCLK: J3.9 R5.1 U1.76 | length 2170.5
  Top Layer w10: U1.76 2156.66,2194.38 2205.6,2145.44 v1(2205.6,2005.2)
  Bottom Layer w10: v1(2205.6,2005.2) 2295.8,1915 2583.5,1915 2694.3,1804.2 2694.3,911.8 2729.5,876.6 2837.8,876.6 2852.6,861.8 R5.1 2955.82,826.8 J3.9
TDA_1.8VN: U1.80 U3.8 | length 536.8
  Top Layer w10: U1.80 2332.72,2273.12 2422.5,2362.9 U3.8
  other v1: 2389.5,2330.4
TDA_5V_3VN: U1.81 U3.7 | length 537
  Top Layer w10: U1.81 2283.8,2292.8 2373.9,2382.9 U3.7
  other v1: 2305.3,2314.8
TDA_CLK: C82.1 U1.51 | length 1354.6
  Top Layer w10: U1.51 1451.98,2047.22 v1(1452.5,2046.7) ; v1@1910.9,1957.6 v1(1920.1,1957.6) 1958.5,1919.2 2271.7,1919.2 2323.9,1971.4 2323.9,2095.8 2388.8,2160.7 C82.1
  Bottom Layer w10: v1(1452.5,2046.7) 1541.6,1957.6 v1(1920.1,1957.6)
TDA_CLKDIV1: U1.83 U3.5 | length 537.2
  Top Layer w10: U1.83 2224.77,2332.17 v1(2315.5,2422.9) U3.5
TDA_CLKDIV2: U1.82 U3.6 | length 537.1
  Top Layer w10: U1.82 2251.09,2312.49 2341.5,2402.9 U3.6
  other v1: 2307.1,2370.5
TDA_CMDVCCN: U1.84 U3.3 | length 583
  Top Layer w10: U1.84 2198.96,2351.86 2355.1,2508 v1(2362.4,2508) 2390.8,2508 2435.9,2462.9 U3.3
TDA_IOUC: U1.47 U3.1 | length 2797.7
  Top Layer w10: U1.47 1349.33,2253.43 1312.6,2216.7 1312.6,2147 v1(1659.8,1799.8) ; v1(2023.2,1886.4) v1(2816.9,1886.4) ; v1(2449.7,2577.2) 2449.7,2506.5 2453.3,2502.9 U3.1
  Bottom Layer w10: v1(1659.8,1799.8) 1730,1799.8 1816.6,1886.4 v1(2023.2,1886.4) ; v1(2449.7,2577.2) 2449.7,2253.6 v1(2816.9,1886.4)
TDA_OFFN: U1.78 U3.10 | length 626.9
  Top Layer w10: U1.78 2503.05,2233.75 2540.4,2271.1 U3.10
TDA_RSTN: U1.79 U3.9 | length 594
  Top Layer w10: U1.79 2494.63,2253.43 2520.4,2279.2 U3.9
TDI: J3.5 R3.2 U1.77 | length 2041.8
  Top Layer w10: U1.77 2162.44,2214.06 2265.1,2111.4 v1(2265.1,2084.8)
  Bottom Layer w10: v1(2265.1,2084.8) 2301,2048.9 2536.6,2048.9 2892.95,1692.55 2892.95,1201.35 2917.8,1176.5 2999.2,1176.5 3010.5,1165.2 3010.5,1055.1 2986.37,1030.97 J3.5@2959.98,1030.97 ; R3.2 J3.5@2959.98,1030.97 ; J3.5 J3.5@2959.98,1030.97
TDO: J3.13 R7.2 U1.89 | length 2791.1
  Top Layer w10: U1.89 2045.12,2450.29 2065,2430.4 v1(2145.6,2430.4) v1@2149,2427
  Bottom Layer w10: v1(2145.6,2430.4) 2161.1,2414.9 2161.1,2249.5 2338.8,2071.8 2555.1,2071.8 2975.4,1651.5 2975.4,1504.6 3184.9,1295.1 3184.9,772.3 3097.3,684.7 2995.2,684.7 2960.98,650.48 J3.13 2951.98,622.97 R7.2
TMS: J3.7 R4.2 U1.72 | length 2207.5
  Top Layer w10: U1.72 1865.37,1944.89 1894.8,1915.45 1894.8,1242.44 2205.27,931.97 J3.7
  Bottom Layer w10: R4.2 2956.98,927.97 J3.7
TRST: J3.3 R2.2 U1.90 | length 2009.3
  Top Layer w10: U1.90 v1(2076.97,2469.97)
  Bottom Layer w10: v1(2076.97,2469.97) 2076.97,2208.97 2260.94,2025 2521.94,2025 2855.98,1690.96 R2.2 2957.98,1134.97 J3.3
TX1: L2.1 U2.11 | length 1363.1
  Top Layer w10: v1(1055.6,876.5) 1093.3,914.2 U2.11 ; L2.1@2105.48,1406.7 L2.1
  Top Layer w30: v1(1972.4,1406.7) L2.1@2105.48,1406.7
  Bottom Layer w30: v1(1055.6,876.5) 1442.2,876.5 v1(1972.4,1406.7)
TX2: L1.1 U2.13 | length 1895.7
  Top Layer w10: v1(1132.8,722) 1133.3,722.5 U2.13 ; L1.1@2118.78,1777.4 L1.1 L1.1@2121.2,1774.98
  Top Layer w30: v1(2121.2,1576.3) L1.1@2121.2,1774.98
  Bottom Layer w10: v1(2121.2,1576.3) v1@2121.4,1576.1
  Bottom Layer w30: v1(1132.8,722) 1470.9,722 2121.4,1372.5 v1@2121.4,1576.1
USB_EN: Q1.1 R8.2 U1.65 | length 1574.1
  Top Layer w10: Q1.1 570.98,2046.97 R8.2 679.13,2056.97 v1(680.3,2055.8) ; v1(1727.5,1879.4) U1.65@1727.5,2134.27
  Bottom Layer w10: v1(680.3,2055.8) 698.2,2037.9 1373.1,2037.9 1531.6,1879.4 v1(1727.5,1879.4)
USBD+: J1.3 R1.1 R11.1 | length 849.1
  Top Layer w10: J1.3 407.24,1711.24 442.97,1746.97 R11.1 790.98,1792.92 636.93,1946.97 R1.1
USBD-: J1.2 R10.1 | length 313.1
  Top Layer w10: J1.2 771.41,1650.39 R10.1
VMID: C27.1 R20.2 U2.16 | length 526.1
  Top Layer w10: U2.16 1193.3,708.7 1275.5,626.5 C27.1 1276.5,565.2 R20.2
pads on no net: J2.0 J2.4 J2.6 J2.8 J3.17 J3.19 MCU_RST.3 MCU_RST.4 P5.3 PowerSW.3 U1.1 U1.2 U1.3 U1.4 U1.5 U1.6 U1.7 U1.8 U1.9 U1.20 U1.21 U1.23 U1.24 U1.25 U1.26 U1.33 U1.34 U1.35 U1.36 U1.38 U1.39 U1.40 U1.41 U1.42 U1.43 U1.44 U1.45 U1.46 U1.48 U1.52 U1.53 U1.54 U1.55 U1.56 U1.57 U1.58 U1.59 U1.60 U1.61 U1.62 U1.63 U1.64 U1.66 U1.69 U1.73 U1.85 U1.86 U1.87 U1.88 U1.91 U1.95 U1.96 U1.97 U1.98 U2.9 U2.25 U2.26 U2.27 U2.28 U3.13 U3.26 U3.27 U3.31 U3.32
copper on no net:
  other v2: 150.98,151.97 4800.98,151.97 150.98,3001.97 4800.98,3001.97
  other v3: 3705.98,437.97 4454.98,437.97 3704.98,2719.97 4454.98,2719.97

## Polygon pours and split planes (outlines as drawn)
GND on Bottom Layer "Bottom Layer" (solid, remove dead copper, pour order 8): 0.98,0.04 4,3.06 4,3156.34 3235.66,3156.34 3236,3156 3237,3155 3237,2 2.94,2 0.98,0.04
GND on Top Layer "Bottom Layer" (solid, remove dead copper, pour order 10): 0.85,3169.37 3236.87,3169.37 3236.87,12.03 3235.83,13.07 -0.13,13.07 -0.13,3168.39 0.85,3169.37

## Keep-outs
Keep-Out Layer:
  lines w10: 0.98,0.04 4950.98,0.04 4950.98,236.97 4950.98,2921.97 4950.98,3156.34 0.98,3156.34 ; 0.98,1.97 0.98,3151.97

## Silkscreen, mask and mechanical layers (free items; w line width, h text height)
Top Overlay:
  lines w10: 700.98,1981.97 730.98,1981.97 ; 700.98,2186.97 730.98,2186.97 ; 700.98,2391.97 730.98,2391.97 ; 701.98,2604.97 731.98,2604.97 ; 715.98,1966.97 715.98,1996.97 ; 715.98,2171.97 715.98,2201.97 ; 715.98,2376.97 715.98,2406.97 ; 716.98,2589.97 716.98,2619.97 ; 2909.98,231.97 2949.98,231.97 ; 2929.98,211.97 2929.98,251.97
  text "RST" at 2962,3086.02 h30
  text "PRES" at 3161.4,3086 h30
  text "IO" at 3285,3086 h30
  text "CLK" at 3069,3085.07 h30
  text "VCC" at 2853,3084 h30
  text "SDA" at 2270.67,2943.9 h30
  text "SCL" at 2152.56,2942.91 h30
  text "GND" at 2048.23,2940.94 h30
  text "3.3" at 1944.88,2939.96 h30
  text "8MHz" at 1280.98,2896.97 h40
  text "D1" at 690.98,2576.97 h40 r90
  text "IO" at 2472,2567 h30
  text "CMDVCC" at 2177,2491.3 h30
  text "DIV1" at 2186,2410 h30
  text "18VN" at 2410,2382.9 h30 r270
  text "D2" at 690.98,2356.97 h40 r90
  text "DIV2" at 2182,2353 h30
  text "LM1117" at 145.98,2271.97 h40
  text "53VN" at 2249,2265 h30
  text "D3" at 695.98,2151.97 h40 r90
  text "D4" at 690.98,1946.97 h40 r90
  text "TX1" at 2625.98,1826.97 h40 r270
  text "RX" at 2625.98,1721.97 h40 r270
  text "GND" at 2625.98,1551.97 h40 r270
  text "TX2" at 2625.98,1436.97 h40 r270
  text "SCK" at 1236,1333 h30 r90
  text "NSS" at 1335.6,1333 h30 r90
  text "MOSI" at 1135,1318 h30 r90
  text "MISO" at 1025,1314 h30 r90
  text "TRST" at 2745.98,1111.97 h40
  text "TDI" at 2748.1,1019 h30
  text "27.12MHz" at 1465,913 h40 r90
  text "TMS" at 2740.98,911.97 h40
  text "NRST" at 2230,852 h30
  text "TCLK" at 2740.6,810.3 h30
  text "IRQ" at 2230.7,751 h30
  text "RTCK" at 2740.6,704.5 h40
  text "GND" at 2229,650 h30
  text "TDO" at 2740.98,611.97 h40
  text "GND" at 2232,549 h30
  text "GND" at 1628,210 h30
  text "GND" at 1829,210 h30
  text "GND" at 1929,210 h30
  text "GND" at 1730,209 h30
  text "AUX1" at 1038,201 h30 r90
  text "AUX2" at 1139,196.1 h30 r90
  text "SIGIN" at 831,194 h30 r90
  text "+5" at 525,191 h30 r90
  text "SIGOU" at 940,190 h30 r90
  text "+3" at 727,188 h30 r90
  text "TVDD" at 629,185 h30 r90
  text "FMREADER_YPF_V01" at 3455.98,171.97 h60
  text "2016-5-3" at 3455.98,46.97 h60
Bottom Overlay:
  text "IO" at 4785.98,1471.97 h40 r90
  text "CLK" at 3295.98,1456.97 h40 r90
  text "RST" at 3295.98,1341.97 h40 r90
  text "GND" at 4785.98,1256.97 h40 r90
  text "VCC" at 3295.98,1226.97 h40 r90
Mechanical 1:
  lines w5: -1,3159 4953,3159 4953,3146 4953,-2 -1,-2 -1,3160

## Text inside footprints (layer, text, board x,y; h text height)
J3: Top Overlay "2" at 3040.98,1331.97 h50 r270; Top Overlay "1" at 2940.98,1331.97 h50 r270; Top Overlay "19" at 2940.98,271.97 h50 r270; Top Overlay "20" at 3040.98,271.97 h50 r270